# Altium PCB IRBeacon.PcbDoc
Units mil, origin at the board's own origin, x right, y up, seen from the top; angles counter-clockwise.
Board outline 2400 x 2400 mil, 4 copper layers (Top Layer, Internal Plane 1, Internal Plane 2, Bottom Layer); 99 components, 84 nets, 413 pads, 157 vias.
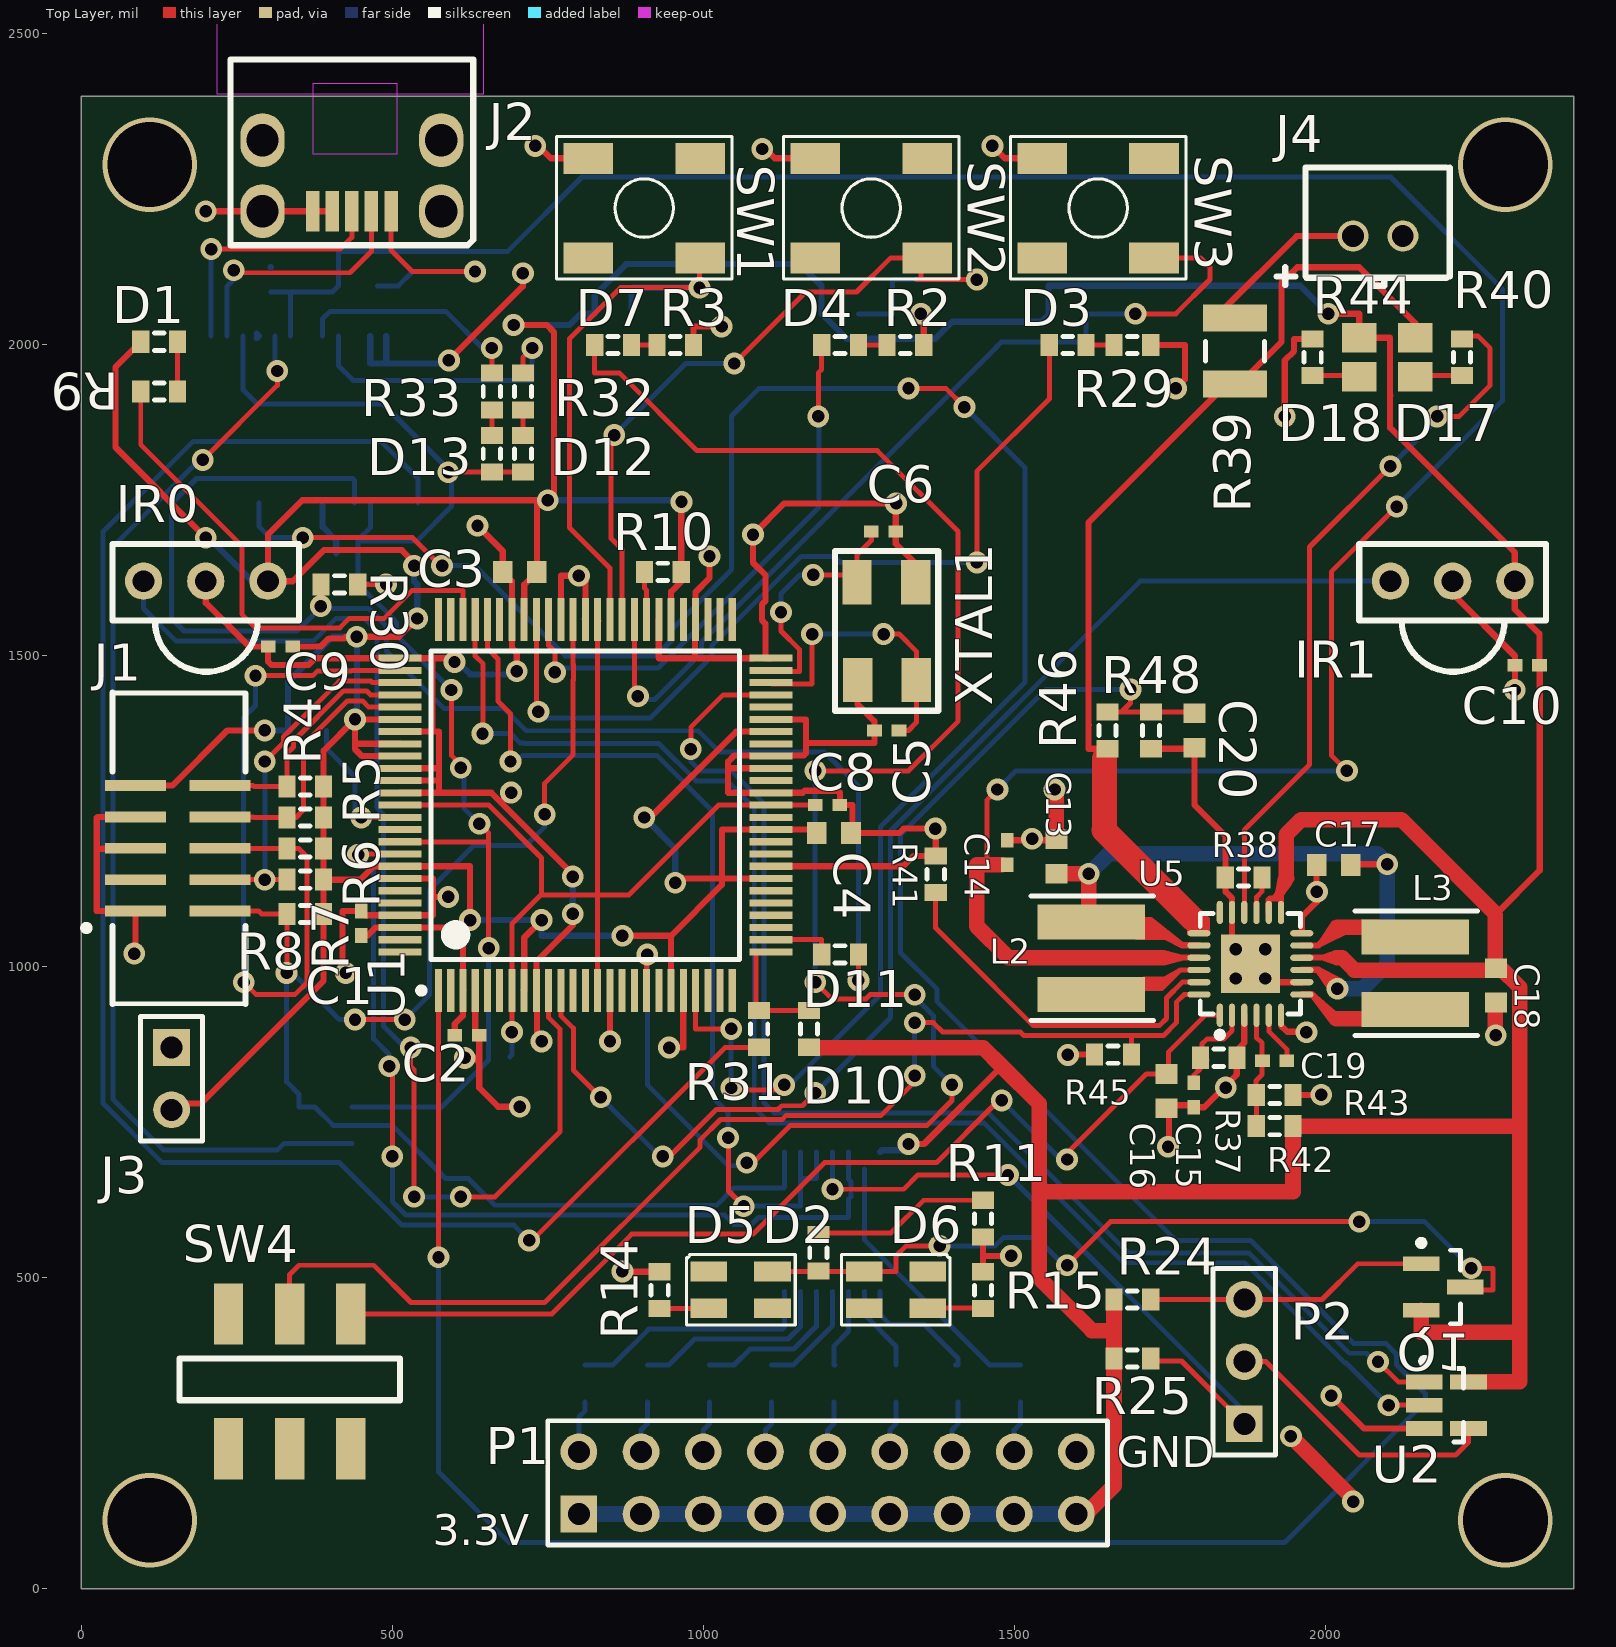
[diagram p0: Top Layer view]
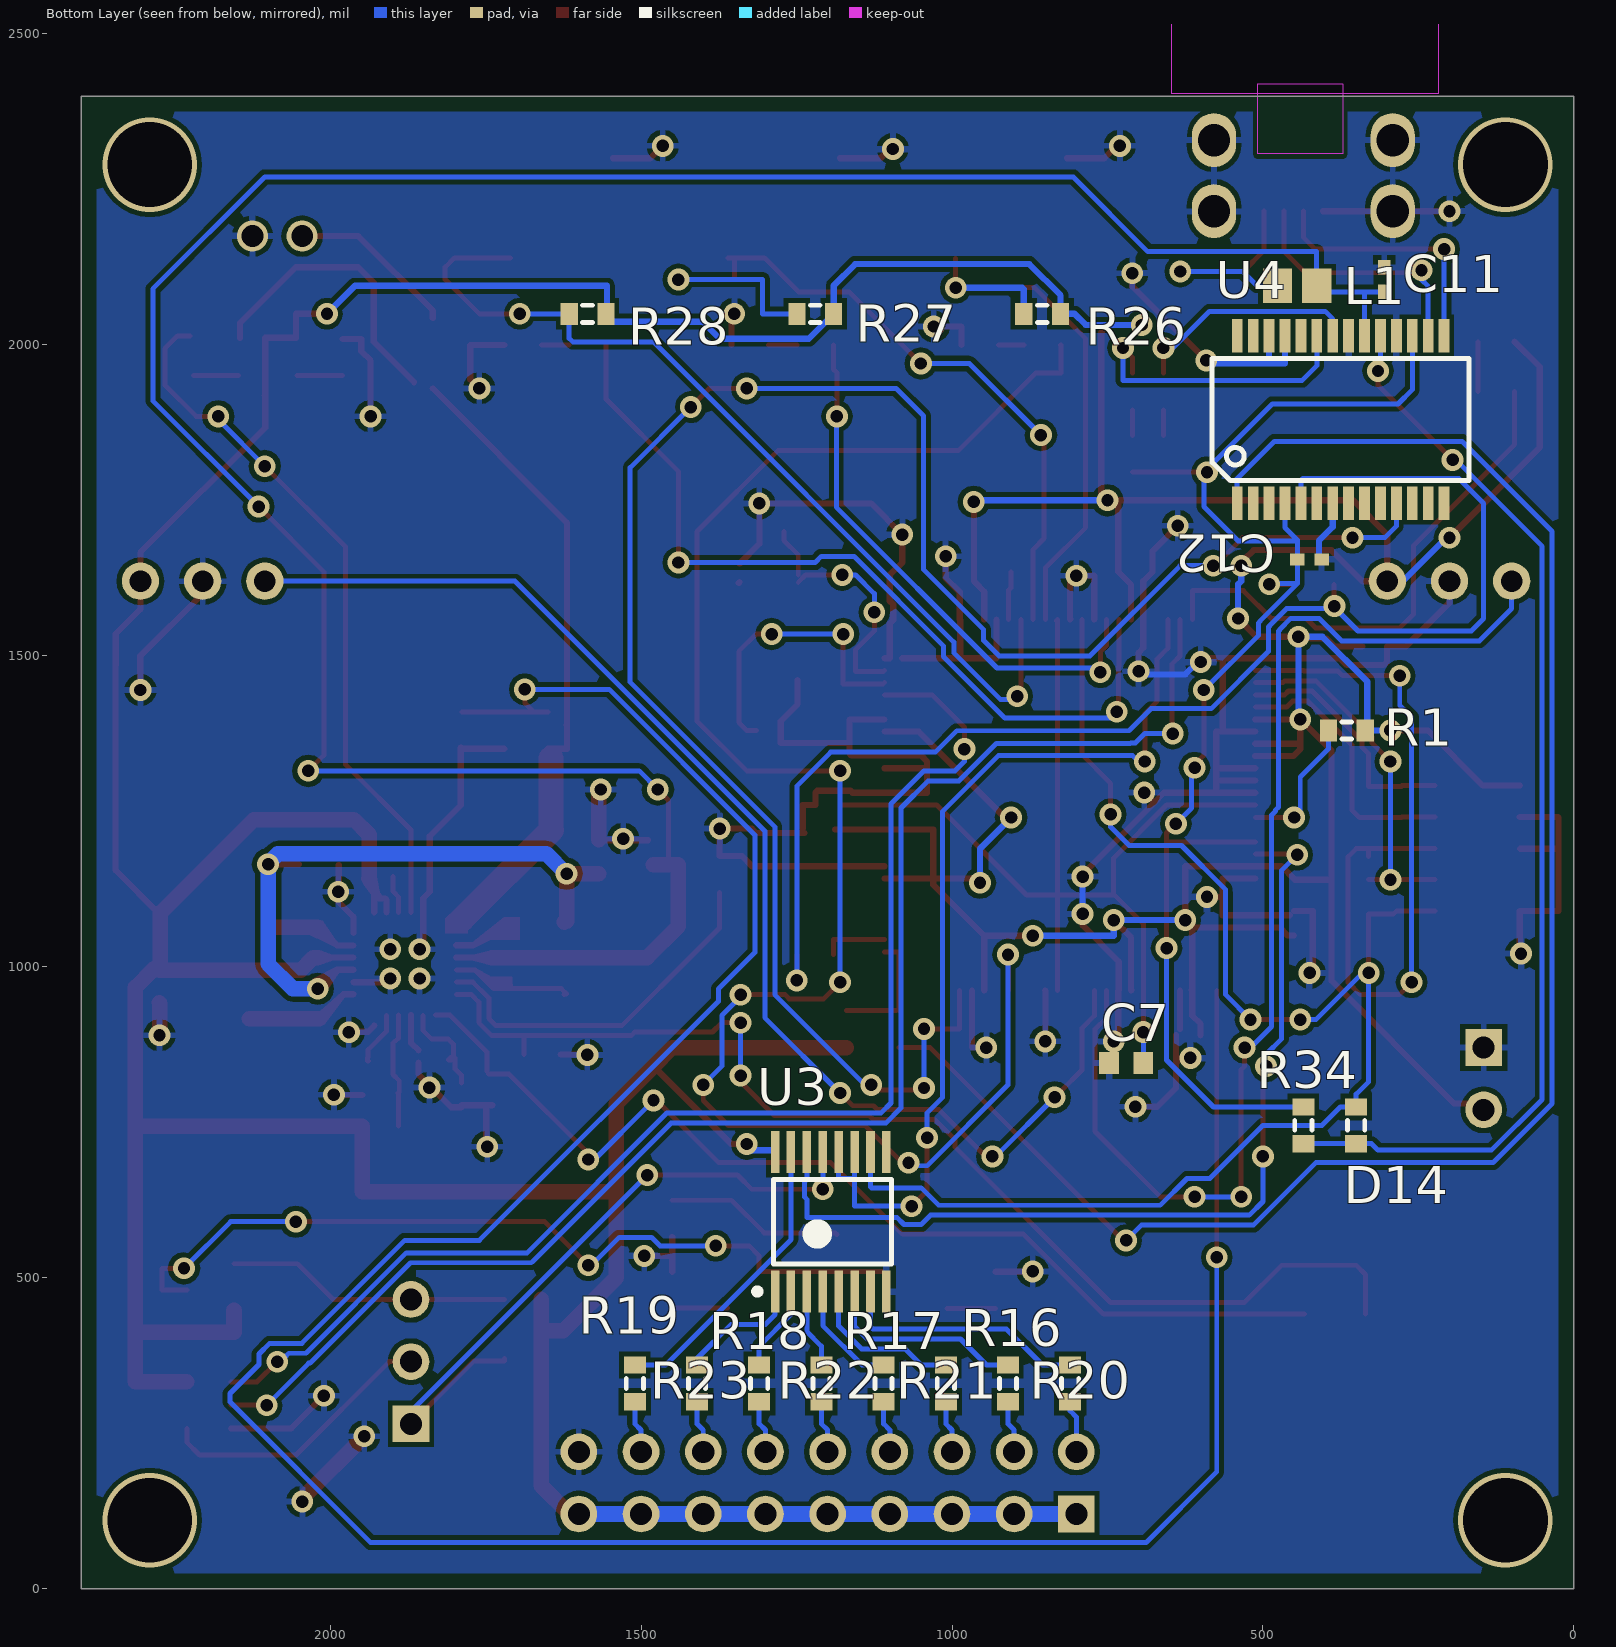
[diagram p1: Bottom Layer view, seen from below]
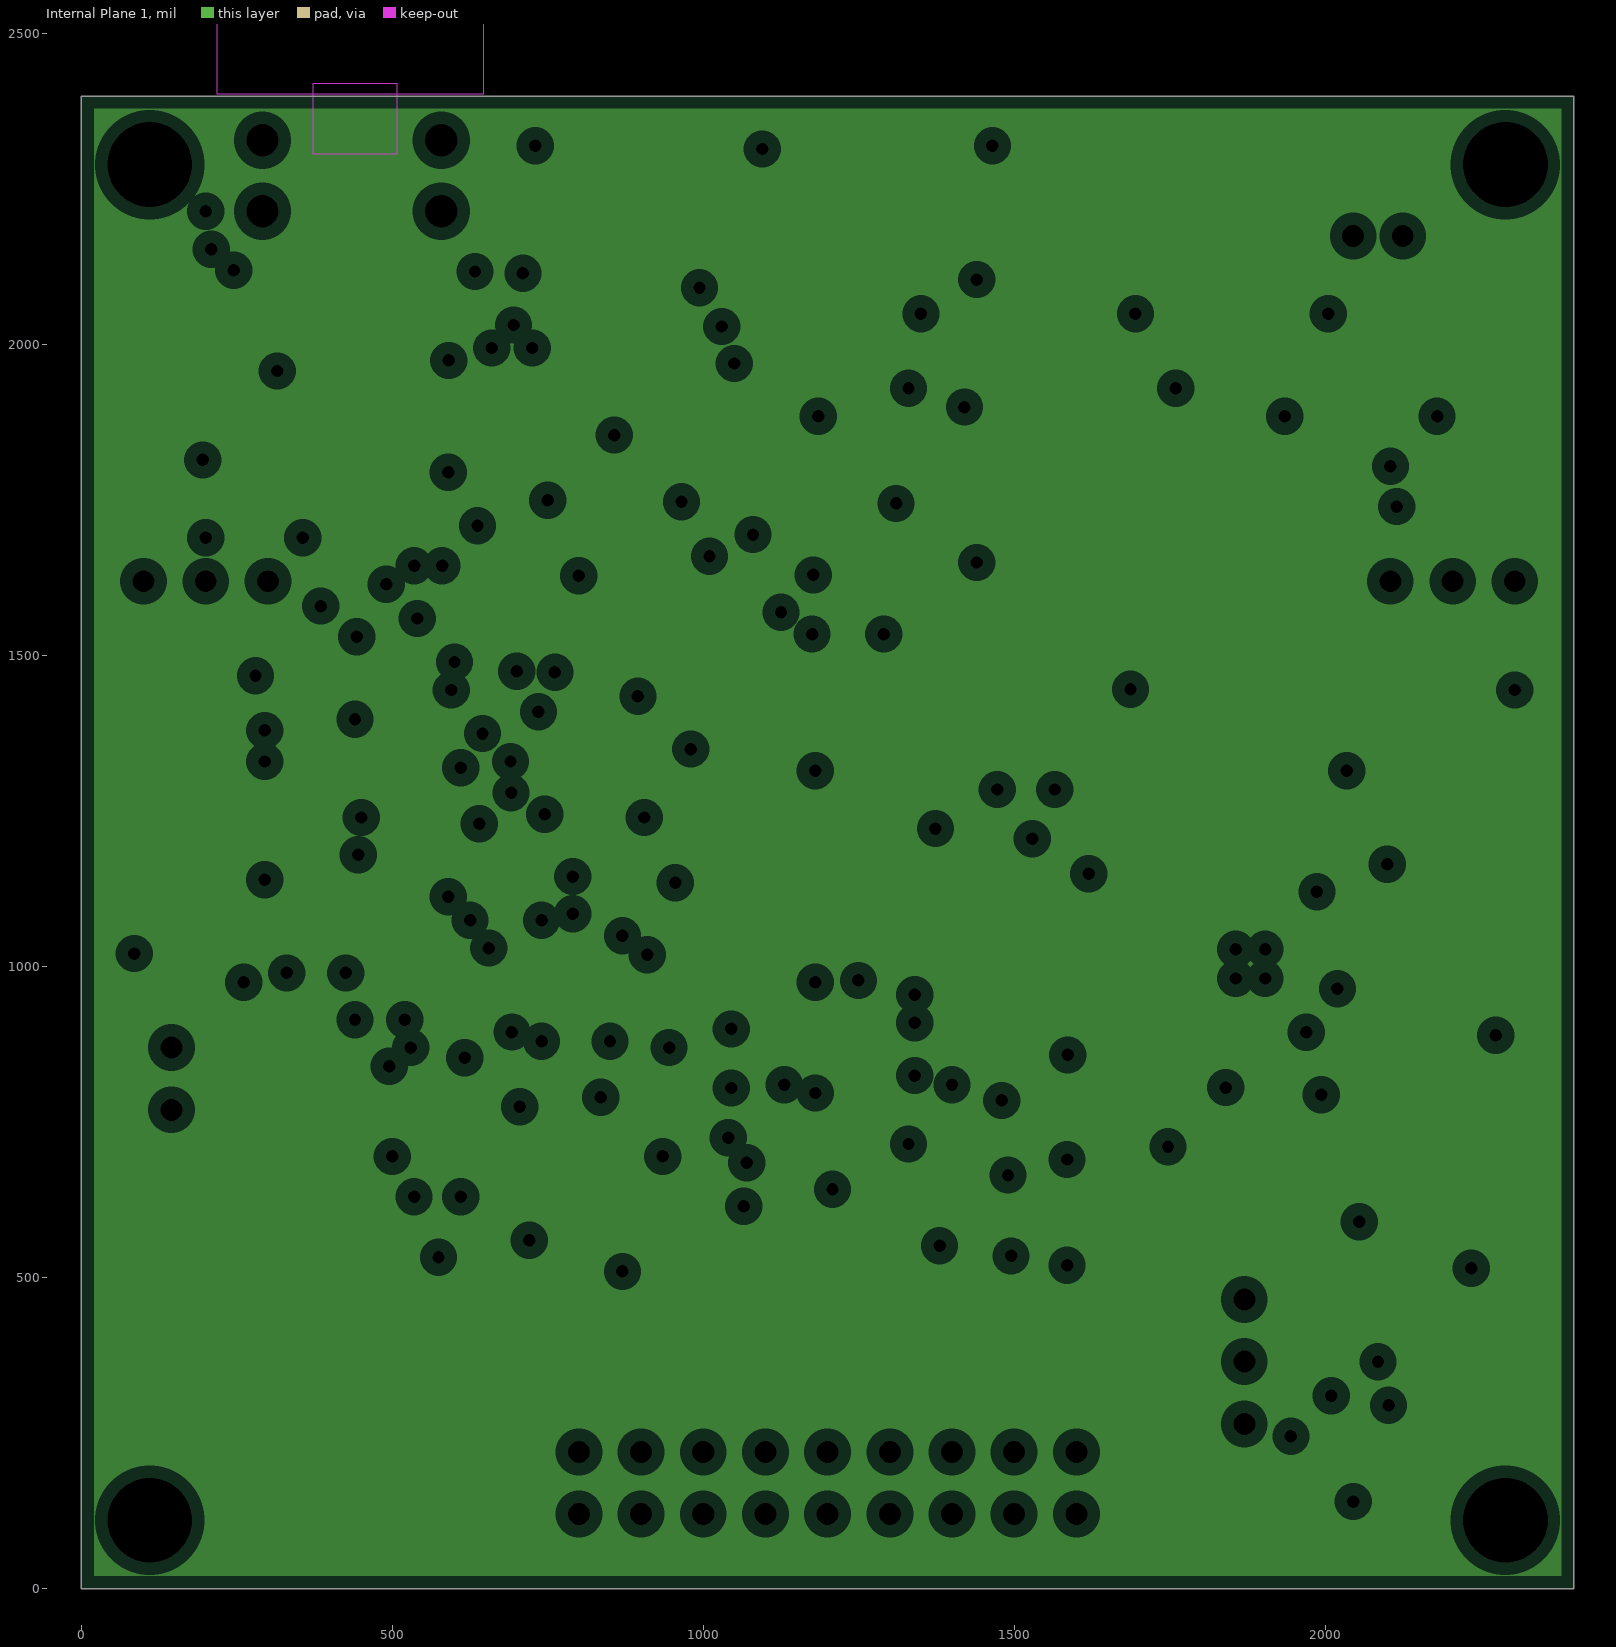
[diagram p2: Internal Plane 1, clearances drawn from the general rule]
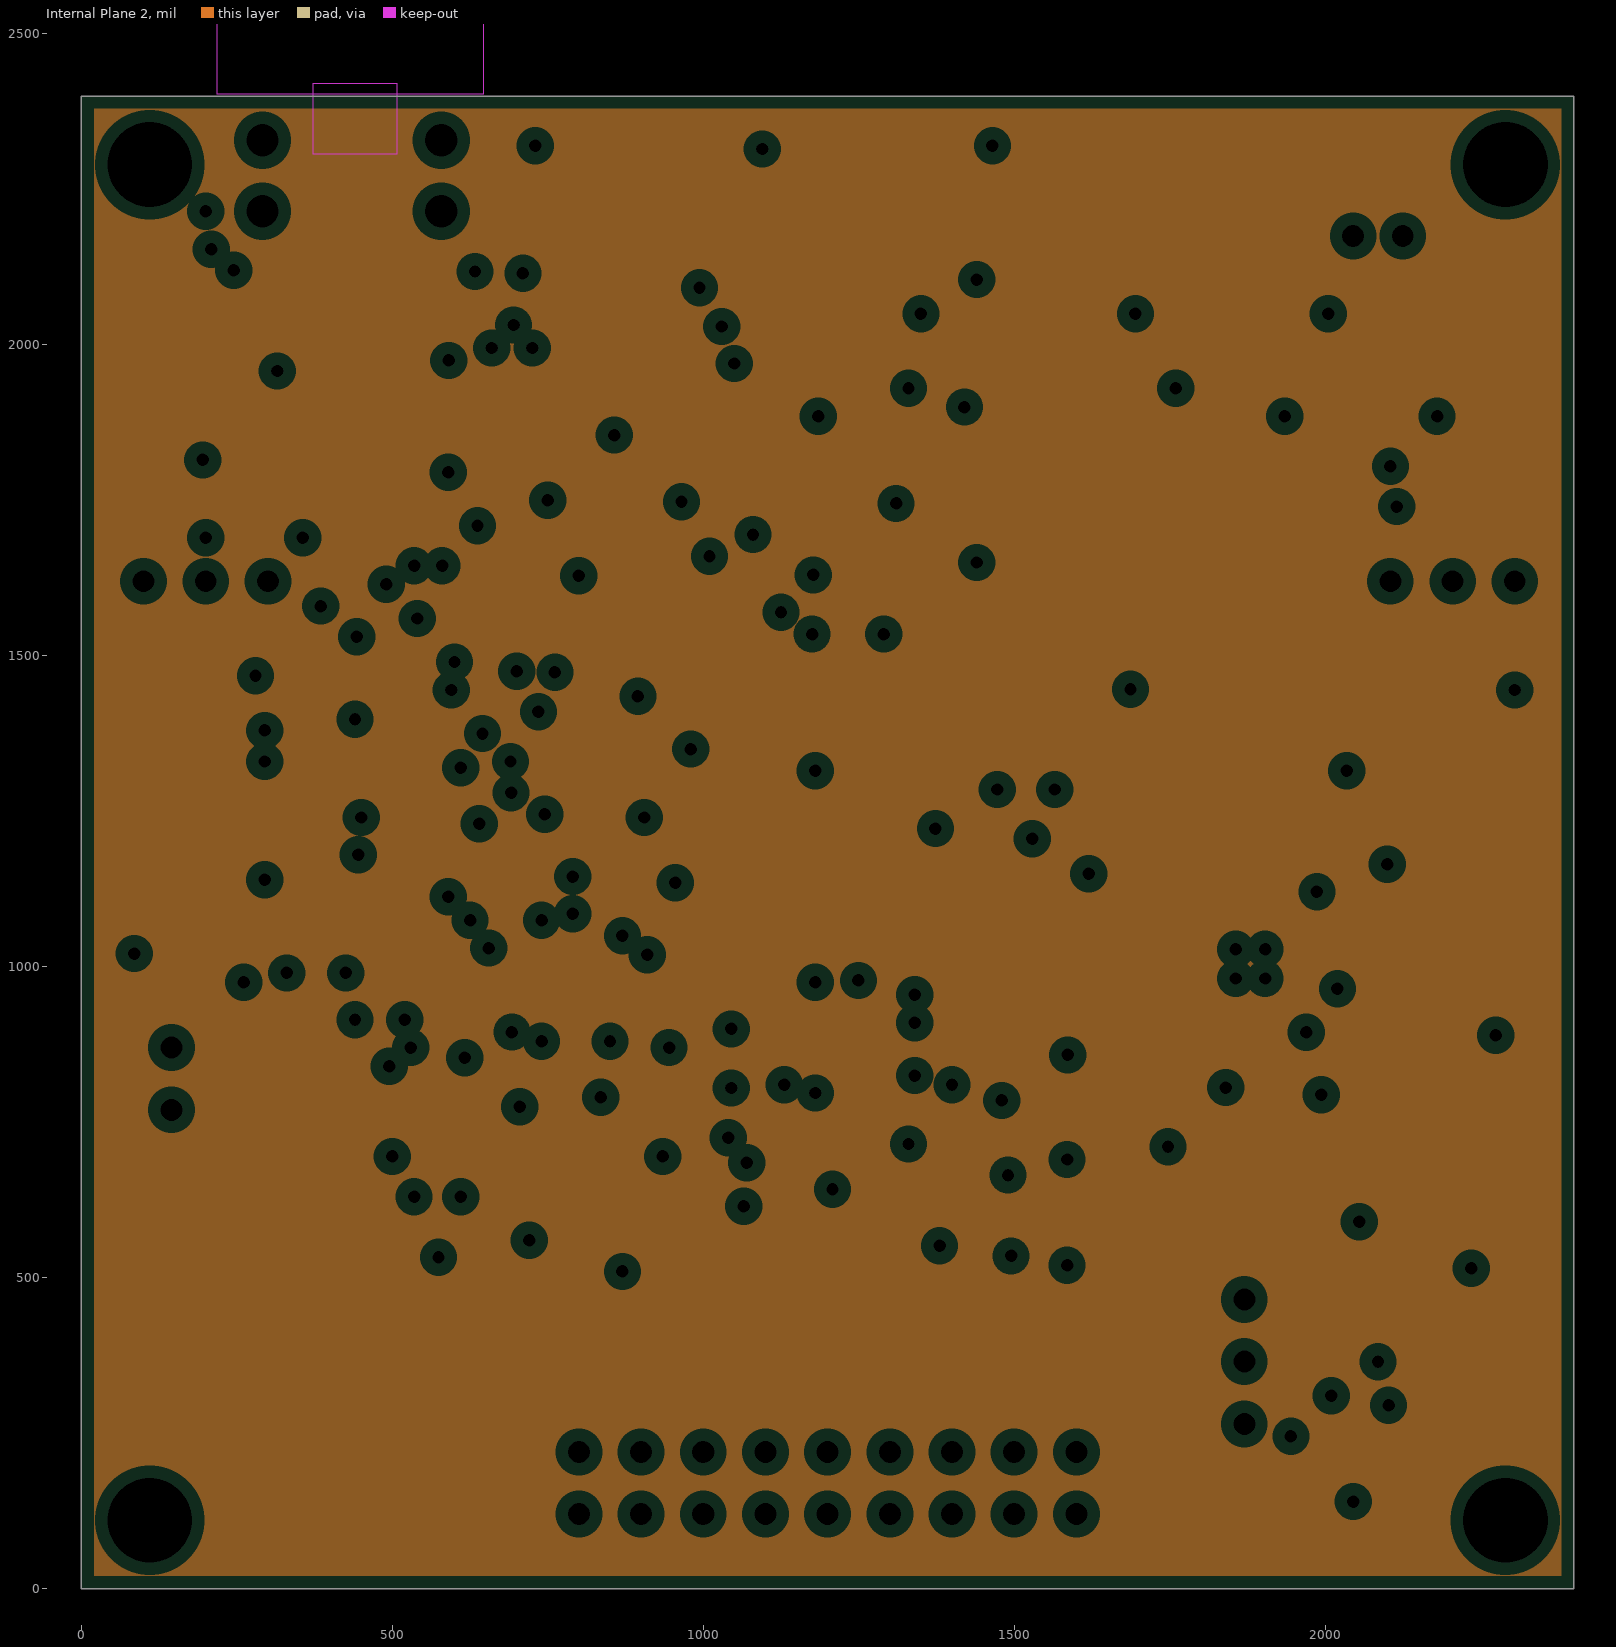
[diagram p3: Internal Plane 2, clearances drawn from the general rule]

## Layer stack, top to bottom
Top Layer: signal copper 1.4
Dielectric: dielectric 12.6, FR-4, Dk 4.8
Internal Plane 1: plane copper 1.4
Dielectric: dielectric 12.6, FR-4, Dk 4.8
Internal Plane 2: plane copper 1.4
Dielectric: dielectric 12.6, FR-4, Dk 4.8
Bottom Layer: signal copper 1.4

## Board outline
0,0 0,2400 2400,2400 2400,0

## Design rules (kind name [scope] priority, off if disabled: settings)
Clearance "Via and Pad" [(IsPad AND IsVia)] p1: gap=20 // Specifies the distance between a via and a component pad
Clearance [All] p2: gap=8
MinimumSolderMaskSliver [All] p1 off: minsoldermaskwidth=10
PlaneClearance [All] p1: clearance=20
PlaneConnect [All] p1: planeconnectstyle=Relief reliefexpansion=20 reliefentries=4 reliefconductorwidth=10 reliefairgap=10
PolygonConnect [All] p1: connectstyle=Relief reliefconductorwidth=10 reliefentries=4 polygonreliefangle="90 Angle"
RoutingVias [All] p1: holewidth=20 width=35 viastyle="Through Hole" minholewidth=20 minwidth=35 maxholewidth=28 maxwidth=40
SilkToSilkClearance [All] p1: silktosilkclearance=8
SilkscreenOverComponentPads [All] p1 off: minsilkscreentomaskgap=10
SolderMaskExpansion [All] p1: expansion=4
Width "Schematic Width Constraint_6" [InNet('VBAT +300')] p1: maxlimit=50 minlimit=10 preferedwidth=25 minimp=50.000000 maximp=50.000000 favimp=50.000000
Width "Schematic Width Constraint_5" [InNet('VBAT')] p2: maxlimit=50 minlimit=10 preferedwidth=25 minimp=50.000000 maximp=50.000000 favimp=50.000000
Width "Schematic Width Constraint_4" [InNet('NetJ4_1')] p3: maxlimit=50 minlimit=10 preferedwidth=25 minimp=50.000000 maximp=50.000000 favimp=50.000000
Width "Schematic Width Constraint_3" [InNet('NetL3_1')] p4: maxlimit=50 minlimit=10 preferedwidth=25 minimp=50.000000 maximp=50.000000 favimp=50.000000
Width "Schematic Width Constraint_2" [InNet('NetL3_2')] p5: maxlimit=50 minlimit=10 preferedwidth=25 minimp=50.000000 maximp=50.000000 favimp=50.000000
Width "Schematic Width Constraint_1" [InNet('GND')] p6: maxlimit=50 minlimit=10 preferedwidth=25 minimp=50.000000 maximp=50.000000 favimp=50.000000
Width "Schematic Width Constraint" [InNet('3.3V')] p7: maxlimit=50 minlimit=10 preferedwidth=25 minimp=50.000000 maximp=50.000000 favimp=50.000000
Width "Schematic Width Constraint_7" [InNet('5VUSB')] p8: maxlimit=25 minlimit=8 preferedwidth=8 minimp=50.000000 maximp=50.000000 favimp=50.000000
Width [All] p9: maxlimit=15 minlimit=8 preferedwidth=8
23 further rules are at their usual default settings.

## Classes and differential pairs
component class CPU: C1 C2 C3 C4 C5 C6 C7 C8 D1 J1 R1 R4 R5 R6 R7 R8 R9 R10 U1 XTAL1
component class IRComms: C9 C10 D2 D5 D6 IR0 P1 P2 Q1 R11 R14 R15 R16 R17 R18 R19 R20 R21 R22 R23 R24 R25 U2 U3
component class LEDsButtons: D3 D4 D7 R2 R3 R26 R27 R28 R29 SW1 SW2 SW3
component class USBHeaders: C11 C12 D10 D11 D12 D13 D14 J2 L1 R30 R31 R32 R33 R34 U4
component class Power: C13 C14 C15 C16 C17 C18 C19 C20 D17 D18 J3 J4 L2 L3 R37 R38 R39 R40 R41 R42 R43 R44 R45 R46 R48 SW4 U5

## Components (designator, comment, footprint, x,y, rotation, side; value= is the part's Value field where it differs from the comment)
C1 "Cap Semi" 0402 450,1070 r270 top
C2 "Cap Semi" 0402 620,890 r180 top
C3 "Cap Semi" 1608[0603] 705,1635 r0 top
C4 "Cap Semi" 1608[0603] 1210,1215 r180 top
C5 "Cap Semi" 0402 1295,1380 r0 top
C6 "Cap Semi" 0402 1290,1700 r180 top
C7 "Cap Semi" 1608[0603] 720,845 r180 bottom
C8 "Cap Semi" 0402 1200,1260 r180 top
C9 "Cap Semi" 0402 320,1515 r0 top
C10 "Cap Semi" 0402 2325,1485 r0 top
C11 "" 0402 305,2105 r270 bottom
C12 "" 0402 425,1655 r0 bottom
C13 "Cap" CAPC1608L 1568.34,1177.18 r270 top (schematic designator C8)
C14 "Cap Semi" CAPC1005L 1488.84,1183.68 r270 top (schematic designator C6)
C15 "Cap" CAPC1005L 1788.84,793.68 r90 top (schematic designator C7)
C16 "Cap" CAPC1608L 1745,800 r270 top (schematic designator C10)
C17 "Cap" CAPC1608L 2013.84,1163.68 r180 top (schematic designator C9)
C18 "Cap" CAPC1608L 2275,970 r90 top (schematic designator C12)
C19 "Cap" CAPC1005L 1918.84,848.68 r0 top (schematic designator C11)
C20 "Cap" CAPC1608L 1790,1380 r90 top
D1 "Heartbeat" SurfaceMount(603) 125,2005 r0 top
D2 "BEACON_PILOT" SurfaceMount(603) 1185,540 r90 top
D3 "blue" SurfaceMount(603) 1586,2000 r0 top
D4 "green" SurfaceMount(603) 1220,2000 r0 top
D5 "IRBeacon" IRBeacon#1 1060,480 r90 top
D6 "IRBeacon" IRBeacon#2 1310,480 r90 top
D7 "red" SurfaceMount(603) 855,2000 r0 top
D10 "Diode" SurfaceMount(603) 1090,900 r90 top
D11 "Diode" SurfaceMount(603) 1220,1020 r0 top
D12 "TXLED" SurfaceMount(603) 710,1825 r90 top
D13 "RXLED" SurfaceMount(603) 660,1825 r90 top
D14 "Diode" SurfaceMount(603) 350,745 r270 bottom
D17 "Charge" 2029 2145,1980 r270 top
D18 "Power" 2029 2055,1980 r270 top
IR0 "GP1UX31QS" GP1UX31QS 200,1620 r90 top locked
IR1 "GP1UX31QS" GP1UX31QS 2205,1620 r90 top
J1 "JTAG" JTAG-10 155,1190.47 r270 top
J2 "USB" "USB Minib (thru-hole)" 435,2215 r270 top locked
J3 "External Power" HDR1X2 145,870 r270 top locked
J4 "Bat" BatteryConnJST 2085,2175 r0 top locked
L1 "Inductor" 2029 445,2095 r180 bottom
L2 "3.3uH" IndPow 1623.84,1013.68 r90 top
L3 "2.2uH" IndPow 2144.84,989.68 r90 top
P1 "Header 9X2" HDR2X9 800,120 r0 top locked
P2 "Header 3" HDR1X3 1870,265 r90 top locked
Q1 "P-Mosfet" SOT-23 2190,485 r0 top
R1 "Res3" J1-0603 365,1380 r0 bottom
R2 "Res3" J1-0603 1325,2000 r180 top
R3 "Res3" J1-0603 955,2000 r180 top
R4 "Res3" J1-0603 360,1290 r0 top
R5 "Res3" J1-0603 360,1240 r0 top
R6 "Res3" J1-0603 360,1190 r0 top
R7 "Res3" J1-0603 360,1140 r0 top
R8 "Res3" J1-0603 360,1085 r0 top
R9 "Res3" J1-0603 125,1925 r0 top
R10 "Res3" J1-0603 935,1635 r0 top
R11 "Res3" J1-0603 1450,595 r90 top
R14 "Res3" J1-0603 930,480 r270 top
R15 "Res3" J1-0603 1450,480 r270 top
R16 "Res3" J1-0603 910,330 r270 bottom
R17 "Res3" J1-0603 1110,330 r270 bottom
R18 "Res3" J1-0603 1310,330 r270 bottom
R19 "Res3" J1-0603 1510,330 r270 bottom
R20 "Res3" J1-0603 810,330 r270 bottom
R21 "Res3" J1-0603 1010,330 r270 bottom
R22 "Res3" J1-0603 1210,330 r270 bottom
R23 "Res3" J1-0603 1410,330 r270 bottom
R24 "Res3" J1-0603 1690,465 r180 top
R25 "Res3" J1-0603 1690,370 r180 top
R26 "Res3" J1-0603 855,2050 r180 bottom
R27 "Res3" J1-0603 1220,2050 r180 bottom
R28 "Res3" J1-0603 1586,2050 r180 bottom
R29 "Res3" J1-0603 1690,2000 r180 top
R30 "Res3" J1-0603 415,1615 r180 top
R31 "Res3" J1-0603 1170,900 r90 top
R32 "" J1-0603 710,1925 r270 top
R33 "" J1-0603 660,1925 r270 top
R34 "Res3" J1-0603 435,745 r270 bottom
R37 "Res3" J1-0603 1828.84,853.68 r180 top (schematic designator R21)
R38 "Res3" J1-0603 1868.84,1143.68 r180 top (schematic designator R22)
R39 "Res3" RESC3225L 1855,1990 r90 top
R40 "Res3" J1-0603 2220,1980 r270 top
R41 "Res3" J1-0603 1373.84,1148.68 r270 top (schematic designator R18)
R42 "Res3" J1-0603 1918.84,743.68 r180 top (schematic designator R23)
R43 "Res3" J1-0603 1918.84,793.68 r0 top (schematic designator R24)
R44 "Res3" J1-0603 1980,1980 r270 top
R45 "Res3" J1-0603 1658.84,858.68 r0 top (schematic designator R19)
R46 "Res3" J1-0603 1650,1380 r270 top
R48 "Res3" J1-0603 1720,1380 r90 top
SW1 "SW_RED" SwitchTall-TL330 905,2220 r180 top
SW2 "SW_GREEN" SwitchTall-TL330 1270,2220 r180 top
SW3 "SW_BLUE" SwitchTall-TL330 1635,2220 r180 top
SW4 "Power Switch" DPDTSwitch 335,225 r180 top
U1 "LM3S8962" LQFP-100 810.47,1260 r90 top locked
U2 "AND" SOT-23-5 2195,295 r0 top
U3 "SN74AHCT595" TSSOP-16 1195,590 r90 bottom locked
U4 "FT232RL" SSOP-28 375,1880 r180 bottom locked
U5 "LTC3566" QFN-24 1879.84,1004.68 r90 top (schematic designator U2)
XTAL1 "8MHz" CRYSTAL 1295,1539.53 r90 top

## Footprints (in the part's own frame and the unit in brackets; to place one, negate y for a bottom-side part, rotate by r counter-clockwise, add the part's x,y. Pads: shape width x height; smd on the part's side, far side on the other; paste and mask are expansions set on the pad)
0402 [mm] "Chip Capacitor, Body 1.0x0.5mm, IPC High Density"
  rect 0.6x0.5 smd: 1(-0.5,0) 2(0.5,0)
  body extent -0.55,-0.3 0.55,0.3, height 1.3
1608[0603] [mm] "Chip Capacitor, Body 1.6x0.8mm, IPC High Density"
  rect 0.8x0.9 smd: 1(-0.7,0) 2(0.7,0)
  body extent -0.87,-0.48 0.87,0.48, height 1.3
2029 [mm] "Chip Inductor, Body 2.0x1.2mm, IPC High Density"
  rect 1.2x1.4 smd: 1(-0.8,0) 2(0.8,0)
  body extent -1.1,-0.7 1.1,0.7, height 0.55
BatteryConnJST [mil] "Connector for Battery"
  round 50 hole 35: 1(-40,0) 2(40,0)
  silkscreen extent -163,-80 116,110
CAPC1005L [mm] "Chip Capacitor, Body 1.0x0.5mm, IPC High Density"
  rect 0.6x0.5 smd: 1(-0.5,0) 2(0.5,0)
  body extent -0.55,-0.3 0.55,0.3, height 1.3
CAPC1608L [mm] "Chip Capacitor, Body 1.6x0.8mm, IPC High Density"
  rect 0.8x0.9 smd: 1(-0.7,0) 2(0.7,0)
  body extent -0.87,-0.48 0.87,0.48, height 1.3
CRYSTAL [mm]
  rect 1.8x1.2 smd: 1(-2,-1.213) 2(2,-1.187) 3(2,1.213) 4(-2,1.187)
  silkscreen extent -3.25,-2.11 3.28,2.11
DPDTSwitch [mm] "surface mount DPDT switch"
  rect 1.2x2.5 smd: 1(-2.5,-5.5) 2(0,-5.5) 3(2.5,-5.5) 4(-2.5,0) 5(0,0) 6(2.5,0)
  silkscreen extent -4.5,-3.68 4.5,-1.98
GP1UX31QS [mil]
  round 60 hole 35: 1(0,100) 2(0,0) 3(0,-100)
  silkscreen extent -146,-150 60,150
HDR1X2 [mm] "Connector; Header; 2 Position"
  rect 1.5x1.5 hole 0.9: 1(0,0)
  round 1.5 hole 0.9: 2(2.54,0)
  silkscreen extent -1.27,-1.27 3.81,1.27
HDR1X3 [mm] "Connector; Header; 3 Position"
  rect 1.5x1.5 hole 0.9: 1(0,0)
  round 1.5 hole 0.9: 2(2.54,0) 3(5.08,0)
  silkscreen extent -1.27,-1.27 6.35,1.27
HDR2X9 [mm] "Connector; Header; 9x2 Position"
  rect 1.5x1.5 hole 0.9: 1(0,0)
  round 1.5 hole 0.9: 2(0,2.54) 3(2.54,0) 4(2.54,2.54) 5(5.08,0) 6(5.08,2.54) 7(7.62,0) 8(7.62,2.54) 9(10.16,0) 10(10.16,2.54) 11(12.7,0) 12(12.7,2.54) 13(15.24,0) 14(15.24,2.54) 15(17.78,0) 16(17.78,2.54) 17(20.32,0) 18(20.32,2.54)
  silkscreen extent -1.27,-1.27 21.59,3.81
IndPow [mil]
  rect 56.5x173 smd: 1(-58.25,0) 2(58.25,0)
  silkscreen extent -100,-100 100,97
IRBeacon#1 [mm]
  rect 0.8x1.5 smd: 1(-0.738,-1.3) 2(0.762,1.3) 3(-0.738,1.3) 4(0.762,-1.3)
  silkscreen extent -1.42,-2.24 1.46,2.21
IRBeacon#2 [mm]
  rect 0.8x1.5 smd: 1(-0.738,1.3) 2(0.762,-1.3) 3(-0.738,-1.3) 4(0.762,1.3)
  silkscreen extent -1.42,-2.21 1.46,2.24
J1-0603 [mm] "Chip Resistor, Body 1.6x0.8mm, IPC High Density"
  rect 0.7x0.9 smd: 1(-0.75,0) 2(0.75,0)
  silkscreen extent -0.2,-0.35 0.2,0.35, body extent -0.85,-0.48 0.85,0.48, height 0.9
JTAG-10 [mm] "Connector, Socket Strip, Double Row, SMT, 20 Position, Vertical, Pitch 2mm, Body 20 x 4 mm (LxW)"
  rect 0.44x2.5 smd: 1(-2.56,-1.73) 2(-2.56,1.73) 3(-1.28,-1.73) 4(-1.28,1.73) 5(0,-1.73) 6(0,1.73) 7(1.28,-1.73) 8(1.28,1.73) 9(2.56,-1.73) 10(2.56,1.73)
  silkscreen extent -6.35,-3.86 6.35,2.77, body extent -6.35,-2.01 6.35,2.03, height 3.56
LQFP-100 [mm] "100-Pin LQFP Package"
  rect 1.75x0.29 smd: 1(-7.575,6) 2(-7.575,5.5) 3(-7.575,5) 4(-7.575,4.5) 5(-7.575,4) 6(-7.575,3.5) 7(-7.575,3) 8(-7.575,2.5) 9(-7.575,2) 10(-7.575,1.5) 11(-7.575,1) 12(-7.575,0.5) 13(-7.575,0) 14(-7.575,-0.5) 15(-7.575,-1) 16(-7.575,-1.5) 17(-7.575,-2) 18(-7.575,-2.5) 19(-7.575,-3) 20(-7.575,-3.5) 21(-7.575,-4) 22(-7.575,-4.5) 23(-7.575,-5) 24(-7.575,-5.5) 25(-7.575,-6) 51(7.575,-6) 52(7.575,-5.5) 53(7.575,-5) 54(7.575,-4.5) 55(7.575,-4) 56(7.575,-3.5) 57(7.575,-3) 58(7.575,-2.5) 59(7.575,-2) 60(7.575,-1.5) 61(7.575,-1) 62(7.575,-0.5) 63(7.575,0) 64(7.575,0.5) 65(7.575,1) 66(7.575,1.5) 67(7.575,2) 68(7.575,2.5) 69(7.575,3) 70(7.575,3.5) 71(7.575,4) 72(7.575,4.5) 73(7.575,5) 74(7.575,5.5) 75(7.575,6)
  rect 0.29x1.75 smd: 26(-6,-7.575) 27(-5.5,-7.575) 28(-5,-7.575) 29(-4.5,-7.575) 30(-4,-7.575) 31(-3.5,-7.575) 32(-3,-7.575) 33(-2.5,-7.575) 34(-2,-7.575) 35(-1.5,-7.575) 36(-1,-7.575) 37(-0.5,-7.575) 38(0,-7.575) 39(0.5,-7.575) 40(1,-7.575) 41(1.5,-7.575) 42(2,-7.575) 43(2.5,-7.575) 44(3,-7.575) 45(3.5,-7.575) 46(4,-7.575) 47(4.5,-7.575) 48(5,-7.575) 49(5.5,-7.575) 50(6,-7.575) 76(6,7.575) 77(5.5,7.575) 78(5,7.575) 79(4.5,7.575) 80(4,7.575) 81(3.5,7.575) 82(3,7.575) 83(2.5,7.575) 84(2,7.575) 85(1.5,7.575) 86(1,7.575) 87(0.5,7.575) 88(0,7.575) 89(-0.5,7.575) 90(-1,7.575) 91(-1.5,7.575) 92(-2,7.575) 93(-2.5,7.575) 94(-3,7.575) 95(-3.5,7.575) 96(-4,7.575) 97(-4.5,7.575) 98(-5,7.575) 99(-5.5,7.575) 100(-6,7.575)
  silkscreen extent -7.7,-6.3 6.3,6.82, body extent -7,-7 7,7, height 1.6
QFN-24 [mm] "QFN, 24-Leads, Body 4.1x4.1mm (max), Pitch 0.50mm, IPC Medium Density"
  oval 0.95x0.25 smd: 1(-2.1,1.25) 2(-2.1,0.75) 3(-2.1,0.25) 4(-2.1,-0.25) 5(-2.1,-0.75) 6(-2.1,-1.25) 13(2.1,-1.25) 14(2.1,-0.75) 15(2.1,-0.25) 16(2.1,0.25) 17(2.1,0.75) 18(2.1,1.25)
  oval 0.25x0.95 smd: 7(-1.25,-2.1) 8(-0.75,-2.1) 9(-0.25,-2.1) 10(0.25,-2.1) 11(0.75,-2.1) 12(1.25,-2.1) 19(1.25,2.1) 20(0.75,2.1) 21(0.25,2.1) 22(-0.25,2.1) 23(-0.75,2.1) 24(-1.25,2.1)
  rect 2.4x2.4 smd: 25(0,0)
  silkscreen extent -3.02,-2.05 2.05,2.05, body extent -2.05,-2.05 2.05,2.05, height 0.8
RESC3225L [mm] "Chip Resistor, Body 3.2x2.5mm, IPC High Density"
  rect 1.1x2.6 smd: 1(-1.35,0) 2(1.35,0)
  silkscreen extent -0.4,-1.2 0.4,1.2, body extent -1.68,-1.32 1.68,1.32, height 0.9
SOT-23 [mm] "SOT23, 3-Leads, Body 3.0x2.5mm (max), Pitch 0.95mm, IPC Medium Density"
  rect 1.5x0.6 smd: 1(-0.9,0.95) 2(-0.9,-0.95) 3(0.9,0)
  silkscreen extent -1.02,-1.5 0.7,1.92, body extent -0.7,-1.5 0.7,1.5, height 1.2
SOT-23-5 [mm] "SOT23, 3-Leads, Body 3.0x2.5mm (max), Pitch 0.95mm, IPC Medium Density"
  rect 1.5x0.6 smd: 1(-0.9,0.95) 2(-0.9,0) 3(-0.9,-0.95) 4(0.9,-0.95) 5(0.9,0.95)
  silkscreen extent -1.02,-1.5 0.7,1.92, body extent -0.7,-1.5 0.7,1.5, height 1.2
SSOP-28 [mm]
  rect 0.44x1.37 smd: 1(-4.225,-3.415) 2(-3.575,-3.415) 3(-2.925,-3.415) 4(-2.275,-3.415) 5(-1.625,-3.415) 6(-0.975,-3.415) 7(-0.325,-3.415) 8(0.325,-3.415) 9(0.975,-3.415) 10(1.625,-3.415) 11(2.275,-3.415) 12(2.925,-3.415) 13(3.575,-3.415) 14(4.225,-3.415) 15(4.225,3.415) 16(3.575,3.415) 17(2.925,3.415) 18(2.275,3.415) 19(1.625,3.415) 20(0.975,3.415) 21(0.325,3.415) 22(-0.325,3.415) 23(-0.975,3.415) 24(-1.625,3.415) 25(-2.275,3.415) 26(-2.925,3.415) 27(-3.575,3.415) 28(-4.225,3.415)
  silkscreen extent -5.25,-2.5 5.25,2.5
SurfaceMount(603) [mm]
  rect 0.7x0.9 smd: 1(-0.75,0) 2(0.75,0)
  silkscreen extent -0.2,-0.35 0.2,0.35, body extent -0.85,-0.48 0.85,0.48, height 0.9
SwitchTall-TL330 [mil] "Small SMDTall Tact Switch E-Switch TL330"
  rect 80x50 smd: 1(-90,-80) 2(90,-80) 3(-90,80) 4(90,80)
  silkscreen extent -141,-115 141,114
TSSOP-16 [mm] "DEMUX & SHIFT REGISTER"
  rect 1.7x0.35 smd: 1(-2.85,2.275) 2(-2.85,1.625) 3(-2.85,0.975) 4(-2.85,0.325) 5(-2.85,-0.325) 6(-2.85,-0.975) 7(-2.85,-1.625) 8(-2.85,-2.275) 9(2.85,-2.275) 10(2.85,-1.625) 11(2.85,-0.975) 12(2.85,-0.325) 13(2.85,0.325) 14(2.85,0.975) 15(2.85,1.625) 16(2.85,2.275)
  silkscreen extent -2.97,-2.49 1.73,3.13, body extent -2.25,-2.55 2.25,2.55, height 1.2
"USB Minib (thru-hole)" [mm]
  rect 1.65x0.55 smd: 1(0,1.6) 2(0,0.8) 3(0,0) 4(0,-0.8) 5(0,-1.6)
  oval 2.2x1.8 hole 1.321: 6(0,3.65) 7(-2.9,3.65) 8(-2.9,-3.65) 9(0,-3.65)
  Keep-Out Layer region: -8.077,-5.512 -4.801,-5.512 -4.801,5.385 -8.077,5.385
  Keep-Out Layer region: -5.207,-1.6 -2.337,-1.6 -2.337,1.854 -5.207,1.854
  silkscreen extent -6.2,-4.95 1.39,4.95

## Part data
C1 C2 C3 C4 C5 C6 C7 C8 C9 C10 C14: "Capacitor (Semiconductor SIM Model)"
C11 C12: library part Cap, "Capacitor"
C13 C15 C16 C17 C18 C19 C20: "Capacitor"
D1 D2 D3 D4 D7: library part LED
D10 D11 D14: library part SchottkeyDiode
D12 D13 D17 D18: library part LED2, "Typical RED, GREEN, YELLOW, AMBER GaAs LED"
J1: library part "Header 5X2H", "Header, 5-Pin, Dual row, Right Angle"
J2: library part USB-ConnTH
J3: library part "Header 2", "Header, 2-Pin"
J4: library part BatteryConnJST
L2 L3: library part Inductor
P1: "Header, 9-Pin, Dual row"
P2: "Header, 3-Pin"
R1 R2 R3 R4 R5 R6 R7 R8 R9 R10 R11 R14 R15 R16 R17 R18 R19 R20 R21 R22 R23 R24 R25 R26 R27 R28 R29 R30 R31 R34 R37 R38 R39 R40 R41 R42 R43 R44 R45 R46 R48: "Resistor"
R32 R33: library part Res1, "Resistor"
SW1 SW2 SW3: library part Switch-TL330
SW4: library part DPDTSwitch
U2: library part AND_gate, "2 input AND gate"
U3: "shift register"
XTAL1: library part Crystal

## Via types
v1: diameter 35, hole 20, Top Layer to Bottom Layer, 149 vias
v2: diameter 35, hole 20, Top Layer to Bottom Layer, tented top, 4 vias
v3: diameter 152, hole 136, Top Layer to Bottom Layer, 4 vias

## Nets (pads, with @x,y where several pads share a name; then routed paths per layer and width w, separated by ;. In a path a pad name is that pad's centre, name@x,y a point inside that pad or via, vN(x,y) a via of type N, cw(c..) or ccw(c..) an arc to the next point about the centre after c; other vN are vias at no path point)
3.3LDO: C16.1 SW4.1 U5.1 | length 1671.8
  Top Layer w8: SW4.1 756.54,441.54 885,570 1080,570 1195,685 1375,685 v1@1470,780 ; v1(1585,690) 1585,700 1712.56,827.56 C16.1 ; C16.1@1747.84,831.68 1747.84,862.68 1807.32,922.16 U5.1@1830.63,922.16
  Bottom Layer w8: v1@1487.5,777.5 1575,690 v1(1585,690)
  other v1: 1480,785
3.3V: C1.2 C2.2 C3.2 C4.2 C9.2 C10.2 C18.2 D1.1 D18.1 IR0.3 IR1.3 J1.1 J3.2 P1.1 P1.3 P1.5 P1.7 P1.9 P1.11 P1.13 P1.15 P1.17 Q1.2 R1.1 R4.2 R5.2 R6.2 R7.2 R8.2 R10.2 R24.2 R25.2 R26.2 R27.2 R28.2 R31.1 R42.1 U1.3 U1.8 U1.20 U1.32 U1.36 U1.44 U1.56 U1.68 U1.81 U1.83 U1.84 U1.93 U1.98 U2.5 U3.16 U5.10 U5.13 U5.14 | length 14236.1
  Top Layer w10: J1.1 146.26,1291.26 235,1380 v1(295,1380) ; D1.1 55,1964.53 55,1835 v1(200,1690) ; J3.2 155,780 192.3,780 389.53,977.23 R8.2 R7.2 ; C9.2 385,1515 398,1528 422.64,1528 425.32,1530.69 v1(443,1530.69) 510.69,1530.69 v1(540,1560) ; v1@440,1385 440,1350 451.26,1338.74 U1.84 ; 441.57,1358.43 U1.83 ; C1.2 460.55,1050.31 473.39,1063.15 U1.98 v1@613.62,1063.15 ; U1.81 v1(440,1397.8) 389.53,1347.32 R4.2 R5.2 R6.2 R7.2 ; v1@530,1645 v1(535,1645) ; v1@530,1655 515,1670 390,1670 340,1620 IR0.3 300,1695 355,1750 v1@732.56,1750 ; C2.2 600.31,908.07 613.62,921.38 U1.3 ; v1@613.62,1075 v1@613.62,1063.15 ; U1.3@614.6,962.75 U1.3 ; v1(625,1075) 625,1161.58 U1.93 470,1161.58 448.42,1140 R7.2 ; v1(695,2032) 748,2032 760,2020 760,1760 v1(750,1750) v1@732.56,1750 ; U1.8@711.38,962.44 U1.8 712.05,1047.05 v1(740,1075) ; U1.68 712.05,1614.49 C3.2 v1@732.56,1750 ; v1(870,1050) 948.27,1050 ; v1(905,1240) 915,1240 1053.11,1378.11 U1.44 ; U1.20 948.27,1050 ; U1.56 948.27,1603.27 964.53,1619.53 R10.2 964.53,1744.53 965,1745 v1(965,1747.5) ; v1@961.89,1141.89 1030,1141.89 ; U1.32 1030,1141.89 ; R31.1@1170,870 R31.1 ; C4.2@1188.19,1220.63 U1.36 1030,1220.63 1030,1141.89 ; v1(1330,715) 1355,715 1480,840 ; U5.14@1909.34,1087.55 1909.34,1107.64 1911.38,1109.68 1929.05,1109.68 ; U5.13@1929.05,1087.52 1929.05,1109.68 ; 1937.18,1145 1929.05,1136.87 1929.05,1109.68 ; U5.10@1962.52,1014.68 2019.84,1014.68 ; v1@2005,2055 v1(2005,2050) 2055,2050 D18.1 2104.44,2011.5 ; 2104.44,2010.94 2104.44,1918.94 ; 2105,1918.38 2104.44,1918.94 ; 2273.34,1083.18 2345,1154.84 C10.2@2345,1484.69 ; C10.2 2344.69,1535.31 2305,1575 IR1.3 2305,1666.33 2104.44,1866.89 2104.44,1918.94 ; U1.3 v1@613.62,1063.15 ; 948.27,1050 1030,1131.73 1030,1141.89
  Top Layer w25: R31.1@1170,870 1450,870 1480,840 1540,780 1540,640 ; P1.17 1615,120 1660.47,165.47 R25.2 1660.47,415 ; R24.2 1660.47,415 ; 1937.18,1145 1937.18,1212.19 1961.68,1236.68 2122.57,1236.68 2272.84,1086.41 ; 2019.84,1014.68 2027.12,1014.68 2047.12,994.68 C18.2@2273.84,994.68 ; Q1.2 2154.57,412.6 2313.22,412.6 ; U2.5 2313.22,332.4 2313.22,412.6 ; C18.2@2273.34,996.74 2273.34,1083.18 ; C18.2@2282.34,997.56 2313.22,966.68 2313.22,412.6 ; 2304.53,743.68 R42.1 1948.37,638.37 1541.63,638.37 1540,640 ; 1540,640 1540,500 1625,415 1660.47,415
  Bottom Layer w10: v1@205,1690 275,1620 IR0.3 ; v1(295,1380) R1.1 ; R1.1@332.31,1383.16 332.31,1458.7 404.3,1530.69 v1(443,1530.69) v1@443,1397.8 ; v1@530,1645 v1(535,1645) 535,1620 540,1615 v1(540,1560) v1@545,1565 ; v1(625,1075) v1(740,1075) 740,1050 v1(870,1050) ; v1(695,2032) 785,2032 803,2050 R26.2 825.47,2079.53 875.94,2130 1155.47,2130 1190,2095.47 R27.2@1190,2055 ; v1(750,1750) 960,1750 965,1745 v1(965,1747.5) ; v1(905,1240) 955,1190 v1(955,1135) ; R27.2 1230.47,2010 1373.33,2010 1400.61,2037.28 1543.76,2037.28 R28.2@1555,2048.53 ; U3.16 1287.36,705 1330,705 v1(1330,715) ; R28.2@1555,2040 R28.2@1555,2048.53 ; R28.2 R28.2@1555,2048.53 ; v1(2005,2050) 1960,2095 1555,2095 R28.2@1555,2048.53
  Bottom Layer w25: P1.1 P1.3 P1.5 P1.7 P1.9 P1.11 P1.13 P1.15 P1.17@1595,120 ; P1.17@1595,125 P1.17
3.3V_FTDI: C12.2 D12.1 D13.1 R30.1 R34.1 U1.91 U4.4 U4.17 | length 2247.2
  Top Layer w8: R30.1@454.53,1615 v1(490,1615) ; U1.91 655,1200.95 ; v1@590.47,1795.47 D13.1 D12.1 ; v1(595,1445) 595,1340 v1@605,1330 ; v1(640,1230) 655,1215 655,1200.95 ; v1(655,1030) 655,1200.95
  Bottom Layer w8: U4.17 259.84,1928 282.84,1905 485,1905 584.81,1805.19 v1@594.81,1805.19 ; R34.1 579.53,774.53 655,850 v1(655,1030) ; 444.69,1686.12 464.57,1706 U4.4 ; v1@478.05,1615 479.03,1615.97 444.69,1615.97 ; v1@595,1790 595,1740 540,1685 444.69,1685 C12.2 444.69,1615.97 ; v1@596,1444 v1(595,1445) 507,1533 507,1553 504.5,1555.5 504.5,1556.16 444.69,1615.97 ; v1@615,1310 615,1255 v1(640,1230)
  other v1: 610,1320 590,1795
5VUSB: C11.2 C14.2 L1.2 U4.20 U5.21 | length 4353.5
  Top Layer w8: 1456,1164 1456,1268 v1(1473,1285) ; v1(2035,1315) 2010,1340 2010,1635 v1(2115,1740)
  Top Layer w10: 1739.84,1014.68 U5.21@1797.16,1014.68
  Top Layer w25: C14.2@1480.45,1164 1456,1164 1439.84,1164 1439.84,1065.18 1490.34,1014.68 1739.84,1014.68
  Bottom Layer w8: C11.2 336.61,2085.31 ; U4.20 336.61,2085.31 ; v1(1473,1285) 1503,1315 v1(2035,1315) ; v1(2115,1740) 2285,1910 2285,2090 2105,2270 805,2270 685,2150 413.5,2150 L1.2 403.82,2085.31 336.61,2085.31
BEACON_ON: P2.3 Q1.1 R24.1 | length 458.8
  Top Layer w8: R24.1 P2.3 1995,465 2052.4,522.4 Q1.1
CHRG: R40.1 U5.16 | length 1131.9
  Top Layer w8: U5.16@1870,1087.52 1870,1220 1975,1325 1975,1675 v1(2105,1805) ; v1(2180,1885) 2215.5,1885 2265.5,1935 2265.5,1994.5 2245.5,2014.5 R40.1@2224.97,2014.5
  Bottom Layer w8: v1(2105,1805) v1@2177.5,1877.5
FTDI_RX: D10.2 R31.2 U1.26 | length 198
  Top Layer w8: D10.2@1085,929.53 1085,1023.78 U1.26 ; D10.2 R31.2
FTDI_TX: D11.1 U1.27 | length 105.2
  Top Layer w8: U1.27 1190.47,1043.47 D11.1
GND: C1.1 C2.1 C3.1 C4.1 C5.1 C6.1 C7.1 C8.1 C9.1 C10.1 C11.1 C12.1 C13.1 C14.1 C15.1 C16.2 C17.2 C18.1 C20.1 IR0.2 IR1.2 J1.3 J1.5 J1.9 J2.4 J2.5 J2.6 J2.7 J2.8 J2.9 J3.1 J4.2 P1.18 R2.1 R3.1 R11.1 R14.1 R15.1 R29.1 R37.1 R38.2 R41.1 R43.2 R44.1 R45.1 R48.1 SW1.2 SW2.2 SW3.2 U1.4 U1.9 U1.15 U1.21 U1.33 U1.39 U1.41 U1.42 U1.45 U1.50 U1.54 U1.57 U1.63 U1.65 U1.69 U1.76 U1.82 U1.85 U1.86 U1.87 U1.94 U1.97 U2.3 U3.8 U4.7 U4.18 U4.21 U4.25 U4.26 U5.3 U5.6 U5.8 U5.12 U5.17 U5.25 XTAL1.2 XTAL1.4 | length 8878
  Top Layer w10: 24.68,1239.68 24.68,1089.69 J1.9 v1@86.89,1023.11 ; 25.87,1189.69 J1.5@86.1,1189.69 ; 25.87,1240.87 J1.3 ; IR0.2 200,1585 270,1515 C9.1 300.32,1490.82 306.13,1485 365,1485 376.22,1496.22 U1.76 565,1496.22 ; v1(200,2215) J2.9 J2.5 J2.4 ; v1(425,990) 420,990 420,1089.68 C1.1 ; C1.1@456.85,1082.84 U1.97 565,1082.84 565,1112.36 ; U1.94 565,1141.89 565,1112.36 ; U1.87 575,1279.69 ; U1.86 574.37,1299.37 ; U1.85 570.94,1319.06 ; U1.82 575,1378.11 575,1279.69 ; 564.5,1378.61 564.5,1495.72 565,1496.22 ; v1@587.64,1112.36 565,1112.36 ; v1(591,1975) 710,2094 v1(710,2115) ; v1(600,1490) 610,1490 603.78,1496.22 565,1496.22 ; v1(616.57,853.43) 615,855 630,855 639.69,845.31 ; 633.31,900 U1.4 ; v1(637,1709) 677.44,1668.56 C3.1 692.36,1620.08 U1.69 692.36,1512.64 700,1505 v1(700,1475) ; C2.1 639.69,845.31 ; v1(690.96,1280) 675,1264.04 ; v1(705,775) 670,775 639.69,805.31 639.69,845.31 ; v1(730,2320) 735,2320 755,2300 SW1.2 ; v1(740,880) 730,880 732.71,882.71 732.71,960.8 U1.9 731.73,1008.31 790,1066.58 v1(790,1085) ; U1.65 771.1,1628.9 v1(800,1628.9) v1@811.65,1628.9 ; v1(790,1145) 790,1149.04 675,1264.04 ; U1.63@809.5,1559.2 U1.63 v1@810.47,1618.23 ; v1@849.84,880.16 U1.15 U1.15@850,961.61 ; v1(870,510) 870.47,509.53 R14.1 ; U1.57 928.58,1496.42 928.78,1496.22 986.66,1496.22 ; v1(945,870) 967.95,870 U1.21 ; R3.1 984.53,2029.53 v1(1029.53,2029.53) ; v1@1010,1650 1010,1625 987.64,1602.64 U1.54 986.66,1557.25 986.66,1496.22 ; 1044.06,1319.06 U1.41 ; U1.50@1080,1496.22 986.66,1496.22 ; v1(1095,2315) 1100,2315 1115,2300 SW2.2 ; U1.33 1321.58,1161.58 1338.21,1178.21 R41.1 v1@1373.84,1211.68 ; U1.45 1165,1397.8 1165,1343.13 1161.58,1339.72 1049.72,1339.72 1040,1330 1040,1280 1040.31,1279.69 U1.39 1159.96,1279.69 1163.12,1282.84 1216.53,1282.84 1219.68,1279.68 C8.1 1240,1260 C4.1@1240,1222.44 ; U1.50 1100,1496.22 1100,1551.87 1094.5,1557.37 1094.5,1582.63 1100,1588.13 1100,1630 1080,1650 v1(1080,1695) 1130,1745 v1(1310,1745) 1309.68,1744.68 C6.1 1309.68,1680.32 XTAL1.2@1341.74,1648.26 ; 1165,1360 1275.31,1360 C5.1 1275.31,1394.69 1248.26,1421.74 XTAL1.4 ; C4.1 1315,1215 1322.18,1222.18 v1(1373.34,1222.18) ; XTAL1.2 XTAL1.2@1343,1617.01 ; v1(1350,2050) 1354.53,2054.53 R2.1 ; R15.1 1450,535 ; R11.1 1450,535 ; v1(1465,2320) 1485,2300 SW3.2 ; C14.1 C13.1@1566.97,1203.37 ; v1(1495,535) 1450,535 ; v1@1526.34,1203.68 1526.34,1206.24 v1@1526.34,1208.18 ; v1@1595.34,858.68 R45.1 ; R29.1 1774.06,2000 1774.53,1999.53 1774.53,1944.53 v1(1760,1930) ; R48.1 C20.1@1788.03,1350.47 ; C16.2@1738.84,777.12 C15.1@1788.84,777.12 ; v1@1748.84,712.18 C16.2@1748.84,776.12 ; C15.1@1788.84,776.28 C15.1 1805.16,774 ; C20.1 1790,1260 1839.84,1210.16 1839.84,1120.68 1850.31,1110.21 U5.17 U5.25@1850.31,1034.21 ; 1806.16,775 1857.84,826.68 R37.1@1857.84,845.68 ; R37.1@1857.84,865.68 1870,877.84 U5.3 ; U5.25@1909.37,975.16 U5.8 ; U5.6@1929.05,905.47 1939.05,895.47 v1@1969.84,895.47 ; v1@1935,1880 v1(1935,1885) 1935,1975 1950,1990 1950,2009.53 R44.1 ; R43.2 v1@1987.84,793.68 ; U5.12@1962.52,1054.05 1962.52,1080.36 v1@1986.84,1104.68 ; v1@1986.28,1120.24 C17.2 ; v1(2010,310) 2062.4,257.6 U2.3 ; IR1.2 2205,1600 2305.31,1499.69 C10.1 2305.31,1455.31 2305,1455 v1(2305,1445) ; 575,1279.69 659.36,1279.69 675,1264.04
  Top Layer w25: v1@1526.34,1206.24 v1@1528.4,1206.24 ; v1(1565,1285) v1@1567.84,1282.16 ; C13.1@1567.84,1204.18 C13.1@1567.84,1204.74 ; v1@1567.84,1285 v1@1567.84,1282.16 ; C13.1 C13.1@1567.84,1204.74 ; v1(1945,245) v1@2045,145 ; v1@2273.84,891.68 2273.84,941.13 C18.1 ; C13.1@1567.84,1204.74 v1@1567.84,1282.16
  Bottom Layer w10: U4.18@282,2011.01 U4.18 U4.18@282.16,2017.72 ; C11.1@304.33,2124.69 C11.1 ; U4.7 387.8,1707.2 410,1685 410,1665 ; 464.57,1970.43 U4.25 ; 464.84,1970.16 490.16,1970.16 ; U4.26 490.16,1970.16 ; v1@586.16,1970.16 490.16,1970.16 ; v1(600,1490) 605,1490 625,1470 695,1470 v1(700,1475) ; v1(790,1085) v1@790,1140
  other v1: 2045,140 1747.34,710.68 1993.84,794.18 1840.34,805.68 1586.34,858.18 850,880 2274.34,889.68 1969.84,894.68 85,1021.22 590,1112.36 1986.84,1120.68 1528.84,1205.68 1010,1660
  other v2: 1856.22,981.06 1903.46,981.06 1856.22,1028.31 1903.46,1028.31
HEADERS_ON: P2.1 R25.1 U3.13 | length 1105.4
  Top Layer w8: v1(1207.8,642.2) 1322.2,642.2 1345,665 v1(1490,665) ; R25.1 1719.53,366 1769,366 P2.1
  Bottom Layer w8: v1(1207.8,642.2) U3.13 ; v1(1490,665) 1870,285 P2.1
IR_BEACON_PWR: U1.47 U2.1 | length 2054.1
  Top Layer w8: v1@980,1360 980,1385 1032.17,1437.17 U1.47 ; v1(2085,365) 2117.6,332.4 U2.1
  Bottom Layer w8: v1(980,1350) 980,1330.25 995.25,1315 1045,1315 1098,1262 1098,781 1114,765 1458.28,765 1683.28,540 1877.37,540 2038.87,378.5 2066.5,378.5 v1@2072.5,372.5
IR_EMIT_0: R19.1 U3.15 | length 448.5
  Bottom Layer w8: U3.15@1258.98,675 1258.98,561.02 1460.47,359.53 R19.1
IR_EMIT_1: R23.1 U3.1 | length 207.1
  Bottom Layer w8: U3.1 1284.57,440.43 1300,425 1335.86,425 1355,425 1410,370 R23.1 ; R23.1@1406,359.53 R23.1 ; R23.1@1409.53,360 R23.1
IR_EMIT_2: R18.1 U3.2 | length 139.4
  Bottom Layer w8: U3.2 1258.98,441.02 1310,390 R18.1
IR_EMIT_3: R22.1 U3.3 | length 130
  Bottom Layer w8: R22.1@1212,359.53 R22.1 1210,390 1233.39,413.39 U3.3
IR_EMIT_4: R17.1 U3.4 | length 179
  Bottom Layer w8: R17.1 1144.53,359.53 1207.8,422.8 U3.4
IR_EMIT_5: R21.1 U3.5 | length 253.8
  Bottom Layer w8: R21.1 1049.53,359.53 1075.31,385.31 1145.31,385.31 1182.2,422.2 U3.5
IR_EMIT_6: R16.1 U3.6 | length 328.5
  Bottom Layer w8: R16.1 944.53,359.53 986.31,401.31 1136.31,401.31 1156.61,421.61 U3.6
IR_EMIT_7: R20.1 U3.7 | length 403.3
  Bottom Layer w8: R20.1 854.53,359.53 912.31,417.31 1127.31,417.31 1131.02,421.02 U3.7
IR_RECV_0: IR0.1 U1.10 | length 1934.5
  Top Layer w8: v1(529.5,870) 529.5,840 535,834.5 v1(535,630) v1@535,620 ; v1(610,630) 665,630 770,735 770,899.58 751.42,918.16 U1.10
  Bottom Layer w8: IR0.1 100,1576 151,1525 ; 152,1524 373.57,1524 409.76,1560.19 455.22,1560.19 472.5,1542.91 472.5,1542.25 475,1539.75 475,1256.72 479.5,1252.22 479.5,1250.5 486,1244 486,904 515,875 v1@540,875 ; v1(535,630) v1(610,630)
IR_RECV_1: IR1.1 U1.11 | length 2029.6
  Top Layer w8: U1.11 771.1,921.1 791,901.2 791,834 v1@825,800 ; v1@945.65,695 1021.15,770.5 1120.25,770.5 1126.25,776.5 1159.5,776.5 v1(1180,797)
  Bottom Layer w8: v1@835.12,789.87 v1@925,700 ; v1(1180,797) 1301,918 1301,1218.37 1702.63,1620 IR1.1
  other v1: 935,695 835,790
IR_XMIT_CLK: U1.71 U3.11 U3.12 | length 1517.3
  Top Layer w8: U1.71 652.99,1512 670,1494.99 670,1427 690,1407 v1(690,1330) ; v1(1040,725) 1045,720 1045,719.5 1040.5,715 1040.5,639.5 v1(1065,615)
  Bottom Layer w8: v1@691.34,1321.34 710,1340 925,1340 1015,1250 1015,790 1040,765 v1(1040,725) ; v1(1065,615) 1156.61,615 ; 1156.61,616.61 1156.61,659.41 ; U3.11 1156.61,659.41 ; U3.12 1182.2,659.41 1156.61,659.41
IR_XMIT_DATA: U1.92 U3.14 | length 1491.8
  Top Layer w8: v1(445,1180) 446.26,1181.26 U1.92 ; v1@500,710 v1@500,839
  Bottom Layer w8: v1(445,1180) 470,1155 470,884 495,859 v1(495,840) ; v1(500,695) 500,622.63 522.13,600.5 1034.5,600.5 1049.5,585.5 1077.22,585.5 1088.72,597 1233.39,597 1233.39,626.07 1237.3,629.98 1237.3,654.42 1233.39,658.33 U3.14
IR_XMIT_PWM: U1.72 U2.2 | length 2430.9
  Top Layer w8: U1.72 633.31,1499.69 646,1487 v1@646,1382 ; v1(2102,295) U2.2
  Bottom Layer w8: v1@645,1380 v1(645,1375) 690,1375 705,1360 712.37,1360 713.37,1359 928.63,1359 988.63,1299 1038.37,1299 1082,1255.37 1082,773.07 1106.51,748.56 1451.78,748.56 1675.34,525 1675.65,525 1676.65,524 1870.75,524 2032.25,362.5 2034.5,362.5 v1(2102,295)
JTAG_TCK: J1.4 R5.1 U1.80 | length 431.1
  Top Layer w8: J1.4 276,1240.87 ; 276.87,1240 R5.1 345,1240 357,1252 357,1356.52 427.78,1427.3 452.22,1427.3 462.04,1417.48 U1.80
JTAG_TDI: J1.8 R7.1 U1.78 | length 582.7
  Top Layer w8: J1.8 v1(294.92,1140.08) ; v1@295,1140 R7.1 ; v1@295,1340 305,1340 325,1360 325,1369.77 414.53,1459.3 465.47,1459.3 467.92,1456.85 U1.78
  Bottom Layer w8: v1@290,1340 295,1335 v1@295,1140
  other v1: 295,1330
JTAG_TDO: J1.6 R6.1 U1.77 | length 1220
  Top Layer w8: J1.6 276,1190.47 ; v1(261,975) 281,955 343.25,955 363,974.75 363,1177 350,1190 R6.1 ; 276.47,1190 R6.1 ; v1(280,1468) 372.04,1468 379.34,1475.3 433.76,1475.3 435,1476.54 U1.77 ; R6.1@330.47,1177 R6.1
  Bottom Layer w8: v1(261,975) 261,1401 280,1420 v1(280,1468) v1@280,1472.81
JTAG_TMS: J1.2 R4.1 U1.79 | length 390.6
  Top Layer w8: J1.2 276,1291.26 ; 277.26,1290 R4.1 330.47,1342.84 341,1353.37 341,1363.14 421.15,1443.3 458.85,1443.3 464.98,1437.17 U1.79
LED_BLUE: D3.1 U1.67 | length 1378.9
  Top Layer w8: U1.67 731.73,1483.27 732,1483 732,1413 v1(735,1410) ; v1(1440,1650) 1440,1796.53 1556.47,1913 1556.47,1978 D3.1
  Bottom Layer w8: v1(735,1410) 745,1400 915,1400 1013.81,1498.81 1013.81,1516.19 1157.58,1659.95 1210.05,1659.95 1220,1650 v1(1440,1650)
LED_GREEN: D4.1 U1.66 | length 886.7
  Top Layer w8: U1.66 751.42,1516.58 761.5,1506.5 v1(761.5,1473.5) ; v1(1185,1885) 1185,1955 1190.47,1960.47 D4.1
  Bottom Layer w8: v1(761.5,1473.5) 768.5,1480.5 927.62,1480.5 1186,1738.88 v1@1186,1885
LED_HEARTBEAT: R9.1 U1.73 | length 861.2
  Top Layer w8: R9.1 95.47,1839.53 258,1677 258,1567 280,1545 415.59,1545 430.78,1560.19 486.91,1560.19 531.4,1604.68 613.62,1604.68 U1.73
LED_RED: D7.1 U1.18 | length 2837.5
  Top Layer w8: D7.1 825,1999.53 825,1955 865,1955 990,1830 1280,1830 1410,1700 1410,1395 1330,1315 v1(1180,1315) ; U1.18 908.9,1018.9 910,1020 v1(910,1019.5) ; v1@1075,685 1080,685 1139.5,744.5 1359.5,744.5 1400,785 v1(1400,810) ; v1(1180,975) 1206.5,948.5 1261.75,948.5 1268.25,955 v1@1325,955
  Bottom Layer w8: v1(910,1019.5) 910,810 1040,680 1055,680 v1@1070,695 ; v1(1180,975) v1(1180,1315) ; v1@1348.36,943.36 1370,921.72 1370,840 v1(1400,810)
  other v1: 1070,685 1340,955
NetC5_2: C5.2 U1.48 XTAL1.1 | length 477.1
  Top Layer w8: U1.48 1110.55,1455 1175,1455 1175,1528.19 1171.56,1531.62 1174.94,1535 v1(1175,1535) ; v1(1290,1535) 1315,1535 1342.74,1507.26 XTAL1.1 1342.74,1392.74 1330,1380 C5.2
  Bottom Layer w8: v1@1174.94,1535 v1(1175,1535) v1(1290,1535)
NetC6_2: C6.2 U1.49 XTAL1.3 | length 381.5
  Top Layer w8: U1.49 1110.24,1475 1155.15,1475 1155.15,1509.85 1125,1540 v1@1125,1555 ; v1@1190,1630 1235.52,1630 XTAL1.3 ; XTAL1.3@1247.26,1630 1247.26,1662.26 1270.31,1685.31 C6.2
  Bottom Layer w8: v1@1135,1568 1125,1578 1125,1600 1155,1630 v1(1176.64,1630)
  other v1: 1125,1570
NetC15_2: C15.2 R37.2 U5.2 | length 173.3
  Top Layer w8: C15.2 1788.84,825.68 1798.84,835.68 1798.84,852.68 R37.2 ; R37.2@1800.02,853.68 R37.2 ; U5.2 1850.31,897.16 1836.84,883.68 1809.84,883.68 1801.84,875.68 1801.84,858.68 1801.84,854 1806,854 1810,850 1799.31,850 R37.2
NetC19_1: C19.1 R42.2 R43.1 U5.4 | length 187.2
  Top Layer w8: U5.4@1889.68,922.16 1889.84,922.01 1889.84,914.68 1889.84,907.68 1889.84,885.68 1898.84,877.68 1898.84,826.68 1888.84,816.68 1888.84,799.68 1890.84,796.68 1889.84,795.68 R42.2@1889.84,744.18
NetC19_2: C19.2 U5.5 | length 88.2
  Top Layer w8: U5.5 1909.37,896.16 1938.84,866.68 1938.84,853.68 1940,853.68 1940,848.68 C19.2
NetD1_2: D1.2 R9.2 | length 80
  Top Layer w8: R9.2 D1.2
NetD2_1: D2.1 D5.4 D6.4 Q1.3 | length 1344.5
  Top Layer w8: D5.4 D6.4 1310,510 1310,535 1326.25,551.25 v1(1380,551.25) ; v1(1585,520) 1655,590 v1(2055,590) ; Q1.3@2230.43,480 2270,480 2270,515 v1(2235,515)
  Bottom Layer w8: v1(1380,551.25) 1469.53,551.25 1483.28,565 1535,565 v1@1580,520 ; v1(2055,590) 2160,590 v1(2235,515)
NetD2_2: D2.2 R11.2 | length 287.8
  Top Layer w8: D2.2 1187.47,572 1302,572 1354.53,624.53 R11.2
NetD3_2: D3.2 R29.2 | length 44.9
  Top Layer w8: D3.2 R29.2
NetD4_2: D4.2 R2.2 | length 45.9
  Top Layer w8: D4.2 R2.2
NetD5_3: D5.3 R14.2 | length 78.3
  Top Layer w8: R14.2 D5.3@1008.35,450.47
NetD6_3: D6.3 R15.2 | length 88.3
  Top Layer w8: D6.3 R15.2@1449.53,450.94
NetD7_2: D7.2 R3.2 | length 40.9
  Top Layer w8: D7.2 R3.2
NetD10_1: D10.1 U4.1 | length 2797.8
  Top Layer w8: v1@732.31,567.31 1035,870 D10.1@1085,870
  Bottom Layer w8: U4.1 541.34,1785 481.34,1845 180,1845 35,1700 35,780 130,685 415,685 515.5,584.5 695.5,584.5 v1@715,565
  other v1: 720,560
NetD11_2: D11.2 R30.2 U4.5 | length 2209
  Top Layer w8: v1(385,1580) v1@385.47,1579.53 ; R30.2 v1@385.47,1579.53 ; v1(1249.53,978) D11.2 ; v1@385.47,1579.53 385.47,1574.53 389.53,1574.53 389.53,1575.47 v1@385.47,1579.53
  Bottom Layer w8: U4.5 438.98,1782.02 436,1785 185,1785 145,1745 145,1560 165,1540 347.16,1540 383.35,1576.19 461.85,1576.19 488.5,1549.53 488.5,1548.87 491,1546.37 491,1507.28 583.28,1415 680,1415 715.5,1379.5 992.22,1379.5 1026.72,1345 1195,1345 1249.53,1290.47 v1(1249.53,978)
NetD12_2: D12.2 R32.2 | length 40.9
  Top Layer w8: D12.2 R32.2
NetD13_2: D13.2 R33.2 | length 40.9
  Top Layer w8: D13.2 R33.2
NetD14_2: D14.2 R34.2 U4.19 | length 1776.9
  Top Layer w8: v1@195,1806 v1(195,1815) 315,1935 v1(315,1958)
  Bottom Layer w8: v1@198.94,1811.06 186.06,1811.06 51,1676 51,786.63 132.63,705 315,705 325.47,715.47 D14.2 R34.2 ; U4.19 311.02,1965.98 317,1960 v1(315,1958)
NetD17_2: D17.2 R40.2 | length 73
  Top Layer w8: D17.2@2146.97,1950.47 R40.2
NetD18_2: D18.2 R44.2 | length 73
  Top Layer w8: R44.2 D18.2@2053.03,1950.47
NetJ2_1: J2.1 L1.1 | length 378.1
  Top Layer w8: J2.1 497.99,2152 531.99,2118 v1(633,2118)
  Bottom Layer w8: L1.1 509.66,2095 532.66,2118 v1(633,2118)
NetJ4_1: J4.1 R39.2 | length 271.8
  Top Layer w10: R39.2@1835,2043.15 1835,2055.46 1954.54,2175 J4.1
NetL2_1: L2.1 U5.22 | length 209.4
  Top Layer w8: L2.1 1619.84,956.43 1628.09,964.68 1737.21,964.68 1767.21,994.68 U5.22@1791.95,994.68 ; U5.22@1780,994.68 1780,994.84 U5.22
NetL3_1: L3.1 U5.7 | length 183.5
  Top Layer w10: U5.7@1962.52,955.63 1978.9,955.63 2017.84,916.68
  Top Layer w25: 2017.84,916.68 L3.1@2129.93,916.68
NetL3_2: L3.2 U5.11 | length 141.8
  Top Layer w10: U5.11 1988.84,1034.21 ; 1988.84,1034.68 2019.75,1063.68
  Top Layer w25: 2019.75,1063.68 L3.2@2092.84,1063.68
NetP1_2: P1.2 R20.2 | length 84.6
  Bottom Layer w8: P1.2 800,275.98 810,285.98 R20.2
NetP1_4: P1.4 R16.2 | length 84.6
  Bottom Layer w8: P1.4 900,255 910,265 R16.2
NetP1_6: P1.6 R21.2 | length 84.6
  Bottom Layer w8: P1.6 1000,255 1010,265 R21.2
NetP1_8: P1.8 R17.2 | length 84.6
  Bottom Layer w8: P1.8 1100,255 1110,265 R17.2
NetP1_10: P1.10 R22.2 | length 84.6
  Bottom Layer w8: P1.10 1200,255 1210,265 R22.2
NetP1_12: P1.12 R18.2 | length 84.6
  Bottom Layer w8: P1.12 1300,255 1310,265 R18.2
NetP1_14: P1.14 R23.2 | length 84.6
  Bottom Layer w8: P1.14 1400,255 1410,265 R23.2
NetP1_16: P1.16 R19.2 | length 84.6
  Bottom Layer w8: P1.16 1500,255 1510,265 R19.2
NetP2_2: P2.2 U2.4 | length 453.2
  Top Layer w8: P2.2 1905,365 2055,215 2210,215 2230.43,235.43 U2.4
NetR1_2: R1.2 U1.89 | length 215.8
  Top Layer w8: v1@465.32,1240.32 U1.89
  Bottom Layer w8: R1.2 394.53,1350.47 440,1305 440,1240 v1(450,1240)
NetR10_1: R10.1 U1.58 | length 78.2
  Top Layer w8: R10.1 905.47,1609 908.9,1605.57 U1.58
NetR32_1: R32.1 U4.23 | length 457.9
  Top Layer w8: R32.1 710,1980 v1(725,1995)
  Bottom Layer w8: U4.23 413.39,1966.61 437,1943 725,1943 v1@725,1985
NetR33_1: R33.1 U4.22 | length 369.5
  Top Layer w8: R33.1 v1(660,1995)
  Bottom Layer w8: U4.22 387.8,2041.8 400,2054 586,2054 645,1995 v1(660,1995)
NetR38_1: R38.1 U5.15 | length 61.5
  Top Layer w8: U5.15@1889.68,1087.52 1889.68,1112.03 1898.84,1121.18 R38.1@1898.84,1145.18
NetR41_2: R41.2 U5.23 | length 593.7
  Top Layer w8: R41.2 1373.84,1062.18 1408.34,1027.68 1530.84,905.18 1733.34,905.18 1744.84,916.68 1744.84,949.68 1770.47,975.31 U5.23@1797.16,975.31
POWER_EN: R45.2 SW4.2 U5.24 | length 1898.5
  Top Layer w8: SW4.2 335,505 350,520 470,520 530,460 745,460 995,710 995,721.72 1027.78,754.5 1126.87,754.5 1132.87,760.5 1285.5,760.5 1340,815 v1(1340,825) ; v1(1340,910) 1370,910 1385,895 1510,895 1515.82,889.18 1739.97,889.18 1760.84,910.06 1760.84,943 1773.32,955.47 U5.24 ; R45.2 1688.37,889.16
  Bottom Layer w8: v1(1340,825) 1340,905 1345,910 v1(1340,910)
RESET: D14.1 J1.10 R8.1 U1.64 U3.10 | length 2359.6
  Top Layer w8: J1.10 285,1089.69 289.69,1085 R8.1 v1@330.47,998.53 ; v1@440,925 v1(440,915) v1(520,915) ; v1@745,1250 745,1295 790.79,1340.79 790.79,1461.07 791,1461.28 791,1485.72 790.79,1485.93 U1.64
  Bottom Layer w8: v1(330,990) 330,815 350,795 D14.1 375.47,774.53 405,745 500,745 585.5,659.5 622.22,659.5 665.22,616.5 1021.5,616.5 1049.5,644.5 1129.5,644.5 1131.02,646.02 U3.10 ; v1@337,993 415,915 v1(440,915) ; v1(520,915) 560,955 560,1120 560.5,1120.5 560.5,1124.58 630.92,1195 715,1195 745,1225 v1(745,1245)
SW_BLUE: R28.1 SW3.3 U1.59 | length 1478.7
  Top Layer w8: U1.59 889.21,1440.79 v1(895,1435) ; v1(1695,2050) 1760,2050 1815,2105 1815,2125 1800,2140 SW3.3 SW3.3@1710,2140
  Bottom Layer w8: v1@905,1430 922.37,1430 997.06,1504.69 997.06,1522.06 1469.28,1994.28 ; 1470,1995 1479.28,2004.28 1609.28,2004.28 1615.53,2010.53 R28.1 v1(1695,2050)
SW_GREEN: R27.1 SW2.3 U1.60 | length 1305.1
  Top Layer w8: v1(857,1855) 852,1850 852,1688.53 869.53,1671 U1.60 ; v1(1050,1970) 1165,2085 1246.53,2085 1301.53,2140 SW2.3@1350,2140 ; 1342.53,2105 1350,2105 ; SW2.3 SW2.3@1350,2140 ; v1(1440,2105) 1350,2105 ; 1350,2105 SW2.3@1350,2140
  Bottom Layer w8: v1(857,1855) 972,1970 v1(1050,1970) ; R27.1 1304.53,2050 1304.53,2105 v1(1440,2105)
SW_RED: R26.1 SW1.3 U1.61 | length 918.6
  Top Layer w8: U1.61 849.84,1641.16 785,1706 785,2010 867,2092 v1(994,2092) SW1.3@994,2139
  Bottom Layer w10: R26.1 884.53,2089.53 887,2092 v1(994,2092)
USB_CTS: U1.22 U4.11 | length 3184.7
  Top Layer w8: v1(356,1690) 532.5,1690 577.5,1645 v1(580,1645) ; U1.22 987.64,900 1032.36,900 v1@1040,892.36 ; v1@1057,802 v1@1132,802 ; v1(1330,1930) 1390,1930 v1(1420,1900)
  Bottom Layer w8: U4.11 285.43,1708.57 304,1690 v1(356,1690) ; v1@577.5,1645 633,1645 778,1500 924.49,1500 949.06,1524.57 949.06,1541.95 1045.5,1638.38 1045.5,1885.5 1090,1930 v1(1330,1930) ; v1@1037.22,812.78 1045,820.56 1045,887.78 v1@1052.22,895 ; v1@1132,802 1285,955 1285,1225 1517.5,1457.5 1517.5,1802.5 v1(1420,1900)
  other v1: 1045,805 1130,810 1045,900
USBDM: J2.2 U4.16 | length 391.3
  Top Layer w8: v1@249,2116 432,2116 466.5,2150.5 J2.2
  Bottom Layer w8: U4.16 234.25,2094.25 v1@245,2105
  other v1: 245,2120
USBDP: J2.3 U4.15 | length 415.8
  Top Layer w8: v1(208.66,2154) 416,2154 435,2173 J2.3
  Bottom Layer w8: U4.15 v1(208.66,2154)
VBAT: D17.1 R39.1 R46.2 U5.19 | length 1491.8
  Top Layer w10: 1620,1388.93 1619.28,1389.65 ; R46.2 1619.28,1350.47 1619.28,1389.65 ; R39.1@1835,1930 1619.28,1714.28 1619.28,1389.65 ; R39.1@1865,1940 1930,2005 1930,2100 1955,2125 2055,2125 2145,2035 D17.1
  Top Layer w40: 1645,1335 1645,1220.97 1644.03,1220 1787.34,1076.68
"VBAT +300": C13.2 C17.1 L2.2 U5.9 U5.20 | length 1038.8
  Top Layer w10: C13.2@1577.34,1150.18 C13.2@1577.59,1150.43 ; 1769.84,1034.68 U5.20@1797.16,1034.68 ; U5.9@1962.52,995 1989.53,995 v1(2019.84,964.68) ; C17.1@2050.4,1164.68 v1(2099.84,1164.68) v1@2103.84,1164.68
  Top Layer w25: C13.2 1619.84,1149.62 1619.84,1072.93 L2.2
  Bottom Layer w25: v1@1621.34,1150.68 1652.34,1181.68 2083.84,1181.68 2099.84,1165.68 v1(2099.84,1164.68) 2099.84,1004.68 2059.84,964.68 v1(2019.84,964.68)
  other v1: 1619.84,1149.68
VBAT_SENSE: C20.2 R46.1 R48.2 U1.1 | length 4510.9
  Top Layer w8: v1(574.25,532.75) U1.1 ; R46.1 1672.53,1409.53 ; v1(1687,1446) 1687,1424 1672.53,1409.53 ; C20.2@1788.03,1409.53 R48.2 1672.53,1409.53
  Bottom Layer w8: v1(574.25,532.75) 574.25,187.75 688,74 1934.7,74 2161.13,300.43 2161.13,313.87 2114.5,360.5 2114.5,377.22 2097.22,394.5 2045.5,394.5 1880,560 1760,560 1375.5,944.5 1375.5,964.5 1317,1023 1317,1211.75 1551.25,1446 v1(1687,1446)
VDD25: C7.2 C8.2 U1.7 U1.14 U1.38 U1.62 U1.88 | length 1694.9
  Top Layer w8: U1.88 655,1260 740,1175 740,1115.5 880.22,1115.5 1024.72,1260 U1.38 C8.2@1175.31,1260 ; v1@692.36,905.24 U1.7 692.36,1069.08 740,1116.72 ; U1.14 830.16,1112.8 ; 830.16,1117.64 U1.62 U1.62@832.13,1556.25
  Bottom Layer w8: C7.2@688.87,855.02 692.34,858.49 v1@692.34,905.22
  other v1: 692.36,895
pads on no net: D5.1 D5.2 D6.1 D6.2 J1.7 SW1.1 SW1.4 SW2.1 SW2.4 SW3.1 SW3.4 SW4.3 SW4.4 SW4.5 SW4.6 U1.2 U1.5 U1.6 U1.12 U1.13 U1.16 U1.17 U1.19 U1.23 U1.24 U1.25 U1.28 U1.29 U1.30 U1.31 U1.34 U1.35 U1.37 U1.40 U1.43 U1.46 U1.51 U1.52 U1.53 U1.55 U1.70 U1.74 U1.75 U1.90 U1.95 U1.96 U1.99 U1.100 U3.9 U4.2 U4.3 U4.6 U4.8 U4.9 U4.10 U4.12 U4.13 U4.14 U4.24 U4.27 U4.28 U5.18
copper on no net:
  other v3: 110,110 2290,110 110,2290 2290,2290

## Polygon pours and split planes (outlines as drawn)
GND on Bottom Layer "Bottom Layer-GND2" (solid, remove dead copper, pour order 3): 25,25 25,2375 2375,2375 2375,25
no net on Internal Plane 1 (split plane): 2379.9,20.1 20.1,20.1 20.1,2379.9 2379.9,2379.9
no net on Internal Plane 2 (split plane): 2379.9,20.1 20.1,20.1 20.1,2379.9 2379.9,2379.9

## Other copper
Top Layer:
  region net 5VUSB: 1788.16,1014.68 1741.84,1026.68 1724.84,1026.68 1724.84,1002.68 1742.84,1002.68
  region net 3.3V: 1982.84,1014.68 2015.5,1026.68 2024.5,1026.68 2024.5,1002.68 2017.84,1002.68
  region net VBAT: 1778.34,1053.68 1814.84,1053.68 1814.84,1077.68 1797.84,1094.18 1778.34,1075.19
  region net NetL3_2: 1987.84,1038.68 2011.84,1073.68 2033.84,1074.68 2031.84,1050.68 2010,1040 1988.84,1029.68
  region net "VBAT +300": 1983.84,992.68 2007.84,957.68 2029.84,956.68 2027.84,980.68 1989.84,999.68
  region net NetL3_1: 1975.84,951.68 2008.84,907.68 2018.84,908.68 2016.84,928.68 1981.84,958.68
  region net NetL2_1: 1768.84,991.68 1765.84,998.68 1740.84,983.68 1707.34,983.68 1706.34,961.68 1737.84,961.68
  region net "VBAT +300": 1771.84,1039.68 1720.84,1079.68 1695.34,1079.68 1695.34,1043.68 1741.84,1043.68 1766.84,1030.68
  region net 3.3V: 1945,1130 1929.05,1109.68 1911.38,1109.68 1920,1120 1925,1145 1950,1145 1950,1140

## Silkscreen, mask and mechanical layers (free items; w line width, h text height)
Mechanical 3:
  lines w10: 0,2395 0,0 2400,0 2400,2400 0,2400

## Text inside footprints (layer, text, board x,y; h text height)
P1: Top Overlay "GND" at 1665,195 h50; Top Overlay "3.3V" at 565,70 h50